# EAGLE board Measure-02b (EAGLE 6.2)
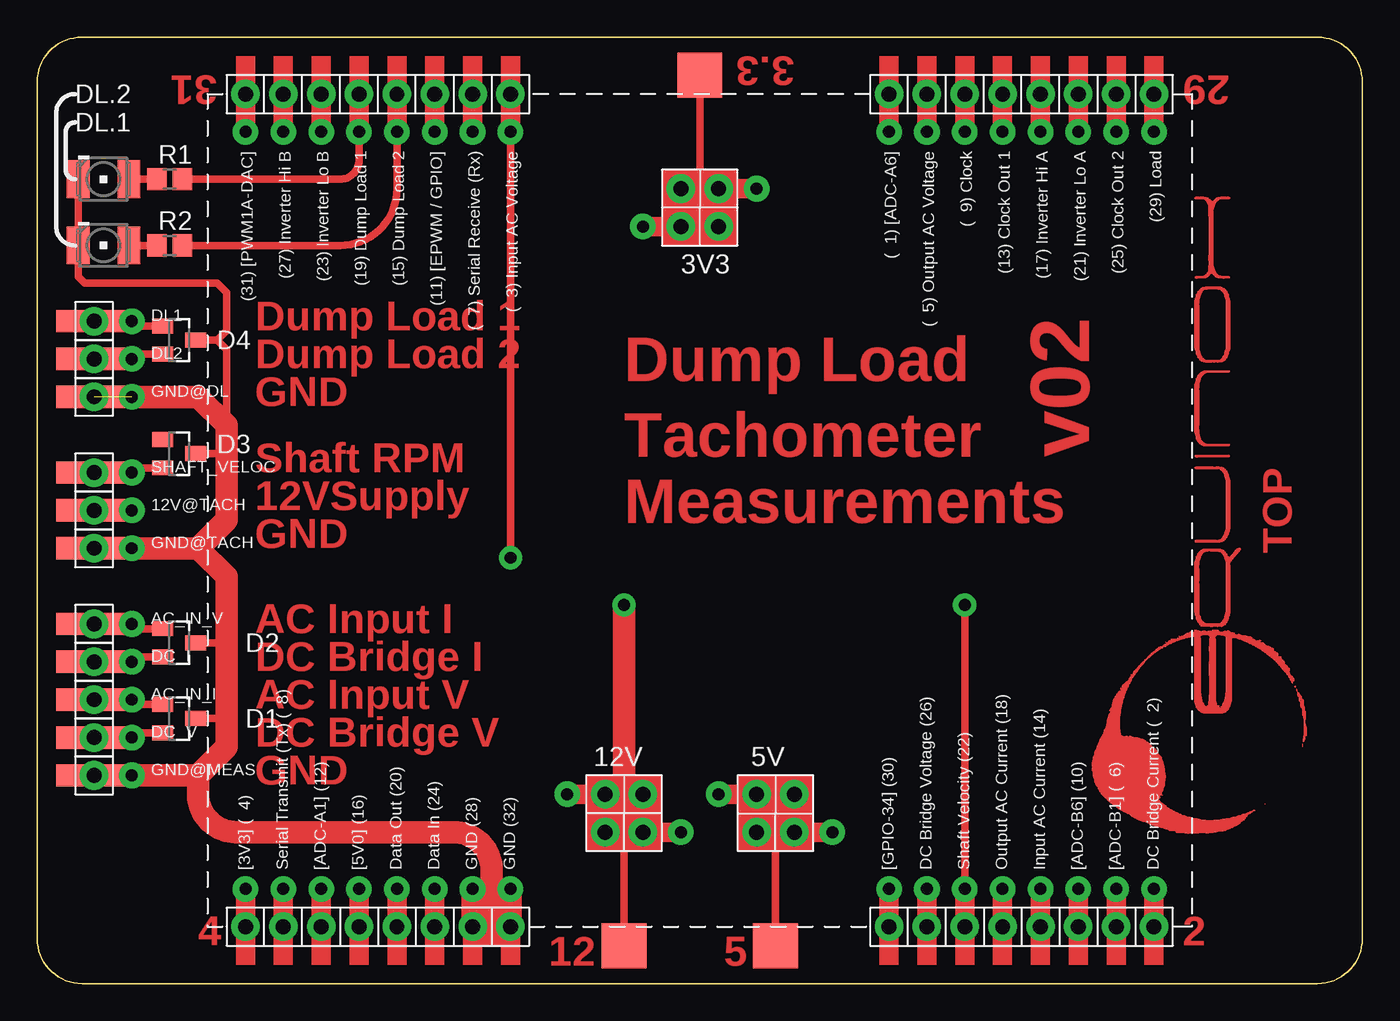
[diagram p0: board, top side]
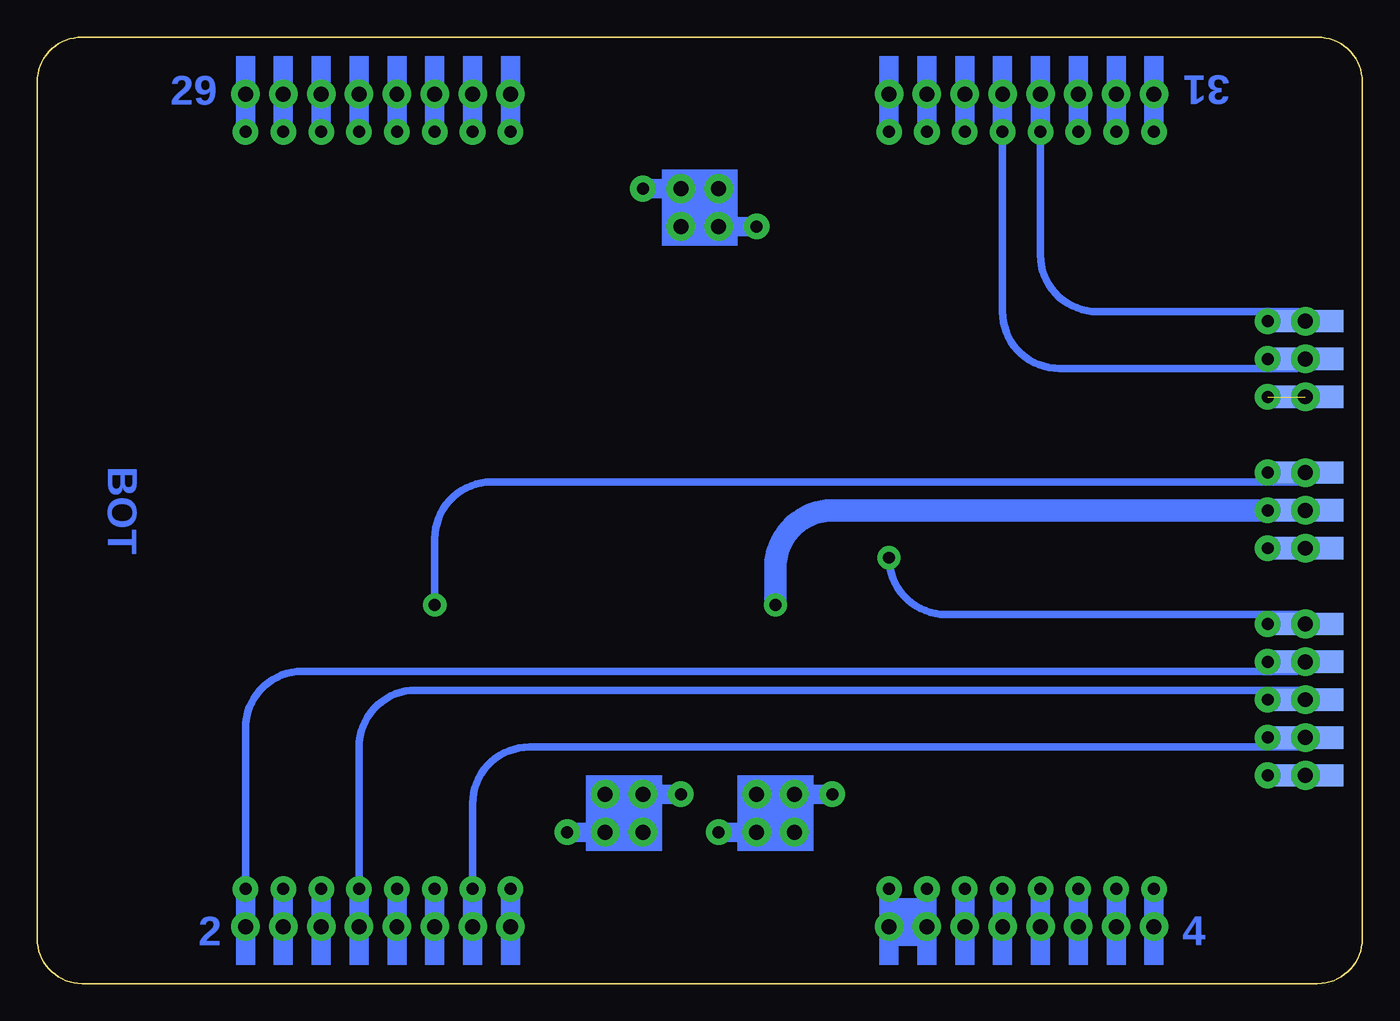
[diagram p1: board, bottom side, seen from below]

Size 88.9 x 63.5 mm. Coordinates in mm from the lower left corner, seen from the top.
Outline: 3,0 85.9,0 arc90 88.9,3 88.9,60.5 arc90 85.9,63.5 3,63.5 arc90 0,60.5 0,3 arc90 3,0
Copper layers (1*16): Top 0.035mm / dielectric 1.5mm / Bottom 0.035mm
Design rules: minimum track width 12mil, minimum drill 0.7mm, track to track 25mil, track to pad 20mil, pad to pad 15mil, via to via 20mil, smd to smd 0mil, copper to edge 40mil, drill to drill 10mil, minimum pad ring 18mil, minimum via ring 15mil, stop-mask expansion 0mil, vias tented up to drill 0mil, thermal gap 15mil
tRestrict: 8 lines
bRestrict: 8 lines

## Footprints (pad centres in the part's own frame; a part is rotated, then mirrored left to right if it is on the bottom)
1X1HEADER(W/VIA) = smd 5.08 x 1.5: P$2 0,0 | smd 5.08 x 1.5 bottom: P$3 0,0 | drill 0.8: P$4 2.54,0 | drill 1: PAD 0,0
SOT23 = smd 1 x 1.4: 1 -0.95,-1.1; 2 0.95,-1.1; 3 0,1.1
PLCC2 = smd 2.54 x 1.524: A 0,1.702; C 0,-1.702
R0805 = smd 1.3 x 1.5: 1 -0.85,0; 2 0.85,0
TESTPAD = smd 3 x 3: TP 0,0
CONTROLLER_STACK = drill 1: 01 -27.94,12.7; 02_DC-BRIDGE-CURRENT 27.94,30.48; 03_INPUT-AC-VOLTAGE -27.94,-12.7; 3V3B -21.59,-1.27; 3V3C -21.59,1.27; 3V3E -19.05,1.27; 3V3F -19.05,-1.27; 04 27.94,-30.48; 05_OUTPUT-AC-VOLTAGE -27.94,15.24; 5VB 19.05,3.81; 5VC 19.05,6.35; 5VE 21.59,6.35; 5VF 21.59,3.81; 06 27.94,27.94; 07_SERIAL-RECEIVE-(RX) -27.94,-15.24; 08_SERIAL-TRANSMIT-(TX) 27.94,-27.94; 09_CLOCK -27.94,17.78; 10 27.94,25.4; 11 -27.94,-17.78; 12 27.94,-25.4; 12VB 19.05,-6.35; 12VC 19.05,-3.81; 12VE 21.59,-3.81; 12VF 21.59,-6.35; 13_CLOCK-OUT-1 -27.94,20.32; 14_AC-INPUT-CURRENT 27.94,22.86; 15_DUMP-LOAD-2 -27.94,-20.32; 16 27.94,-22.86; 17_INVERTER-HI-A -27.94,22.86; 18_AC-OUTPUT-CURRENT 27.94,20.32; 19_DUMP-LOAD-1 -27.94,-22.86; 20_DATA-OUT 27.94,-20.32; 21_INVERTER-LO-A -27.94,25.4; 22_SHAFT-VELOCITY 27.94,17.78; 23_INVERTER-LO-B -27.94,-25.4; 24_DATA-IN 27.94,-17.78; 25_CLOCK-OUT-2 -27.94,27.94; 26_DC-BRIDGE-VOLTAGE 27.94,15.24; 27_INVERTER-HI-B -27.94,-27.94; 28_GND 27.94,-15.24; 29_LOAD -27.94,30.48; 30 27.94,12.7; 31 -27.94,-30.48; 32_GND 27.94,-12.7 | drill 0.8: 3V3A -21.59,3.81; 3V3D -19.05,-3.81; 5VA 19.05,1.27; 5VD 21.59,8.89; 12VA 19.05,-8.89; 12VD 21.59,-1.27; C1 -25.4,12.7; C2 25.4,30.48; C3 -25.4,-12.7; C4 25.4,-30.48; C5 -25.4,15.24; C6 25.4,27.94; C7 -25.4,-15.24; C8 25.4,-27.94; C9 -25.4,17.78; C10 25.4,25.4; C11 -25.4,-17.78; C12 25.4,-25.4; C13 -25.4,20.32; C14 25.4,22.86; C15 -25.4,-20.32; C16 25.4,-22.86; C17 -25.4,22.86; C18 25.4,20.32; C19 -25.4,-22.86; C20 25.4,-20.32; C21 -25.4,25.4; C22 25.4,17.78; C23 -25.4,-25.4; C24 25.4,-17.78; C25 -25.4,27.94; C26 25.4,15.24; C27 -25.4,-27.94; C28 25.4,-15.24; C29 -25.4,30.48; C30 25.4,12.7; C31 -25.4,-30.48; C32 25.4,-12.7

## Placement (x,y rotation side)
12V@TACH  1X1HEADER(W/VIA)  [1X1HEADER(W/VIA)]  3.81,31.75 0 top
AC_IN_I  1X1HEADER(W/VIA)  [1X1HEADER(W/VIA)]  3.81,19.05 0 top
AC_IN_V  1X1HEADER(W/VIA)  [1X1HEADER(W/VIA)]  3.81,24.13 0 top
D1  BAS40-06  [SOT23]  9.53,17.78 270 top
D2  BAS40-06  [SOT23]  9.53,22.86 270 top
D3  BAS40-06  [SOT23]  9.53,35.56 270 top
D4  BAS40-06  [SOT23]  9.53,43.18 270 top
DC_I  1X1HEADER(W/VIA)  [1X1HEADER(W/VIA)]  3.81,21.59 0 top
DC_V  1X1HEADER(W/VIA)  [1X1HEADER(W/VIA)]  3.81,16.51 0 top
DL1  1X1HEADER(W/VIA)  [1X1HEADER(W/VIA)]  3.81,44.45 0 top
DL2  1X1HEADER(W/VIA)  [1X1HEADER(W/VIA)]  3.81,41.91 0 top
DL.1  PLCC2  [PLCC2]  4.45,53.98 270 top
DL.2  PLCC2  [PLCC2]  4.45,49.53 270 top
GND@DL  1X1HEADER(W/VIA)  [1X1HEADER(W/VIA)]  3.81,39.37 0 top
GND@MEAS  1X1HEADER(W/VIA)  [1X1HEADER(W/VIA)]  3.81,13.97 0 top
GND@TACH  1X1HEADER(W/VIA)  [1X1HEADER(W/VIA)]  3.81,29.21 0 top
R1  39  [R0805]  8.89,53.98 180 top
R2  39  [R0805]  8.89,49.53 180 top
SHAFT_VELOC  1X1HEADER(W/VIA)  [1X1HEADER(W/VIA)]  3.81,34.29 0 top
T3V3  TESTPAD  [TESTPAD]  44.45,60.96 0 top
T5V0  TESTPAD  [TESTPAD]  49.53,2.54 180 top
T12V0  TESTPAD  [TESTPAD]  39.37,2.54 180 top
U$1  CONTROLLER_STACK  [CONTROLLER_STACK]  44.45,31.75 270 top

## Library data of the parts
12V@TACH AC_IN_I AC_IN_V DC_I DC_V DL1 DL2 GND@DL GND@MEAS GND@TACH SHAFT_VELOC = headers v6-2
D1-D4 = diode
DL.1 DL.2 T3V3 T5V0 T12V0 U$1 = PCB_ControlStack
R1 R2 = resistor

## Nets
3V3: T3V3.TP U$1.3V3A U$1.3V3B U$1.3V3C U$1.3V3D U$1.3V3E U$1.3V3F
5V0: T5V0.TP U$1.5VA U$1.5VB U$1.5VC U$1.5VD U$1.5VE U$1.5VF
12V0: 12V@TACH.P$2 12V@TACH.P$3 12V@TACH.P$4 12V@TACH.PAD T12V0.TP U$1.12VA U$1.12VB U$1.12VC U$1.12VD U$1.12VE U$1.12VF
ADCA0: AC_IN_V.P$2 AC_IN_V.P$3 AC_IN_V.P$4 AC_IN_V.PAD D2.1 U$1.03_INPUT-AC-VOLTAGE U$1.C3
ADCA2: D2.2 DC_I.P$2 DC_I.P$3 DC_I.P$4 DC_I.PAD U$1.02_DC-BRIDGE-CURRENT U$1.C2
ADCA5: D3.2 SHAFT_VELOC.P$2 SHAFT_VELOC.P$3 SHAFT_VELOC.P$4 SHAFT_VELOC.PAD U$1.22_SHAFT-VELOCITY U$1.C22
ADCB0: AC_IN_I.P$2 AC_IN_I.P$3 AC_IN_I.P$4 AC_IN_I.PAD D1.1 U$1.14_AC-INPUT-CURRENT U$1.C14
ADCB2: D1.2 DC_V.P$2 DC_V.P$3 DC_V.P$4 DC_V.PAD U$1.26_DC-BRIDGE-VOLTAGE U$1.C26
EPWM3A: D4.1 DL1.P$2 DL1.P$3 DL1.P$4 DL1.PAD R1.1 U$1.19_DUMP-LOAD-1 U$1.C19
EPWM3B: D4.2 DL2.P$2 DL2.P$3 DL2.P$4 DL2.PAD R2.1 U$1.15_DUMP-LOAD-2 U$1.C15
GND: D1.3 D2.3 D3.3 D4.3 DL.1.C DL.2.C GND@DL.P$2 GND@DL.P$3 GND@DL.P$4 GND@DL.PAD GND@MEAS.P$2 GND@MEAS.P$3 GND@MEAS.P$4 GND@MEAS.PAD GND@TACH.P$2 GND@TACH.P$3 GND@TACH.P$4 GND@TACH.PAD U$1.28_GND U$1.32_GND U$1.C28 U$1.C32
N$1: DL.2.A R2.2
N$2: DL.1.A R1.2
STARTUP: D3.1

## Tracks (layer width: path | path; a pad name or v marks a point on that pad's centre or on a via)
3V3
  Top 0.5: T3V3.TP 44.45,53.34 U$1.3V3C
  Bottom 0.5: U$1.3V3D U$1.3V3F U$1.3V3B U$1.3V3C | U$1.3V3A U$1.3V3C | U$1.3V3E U$1.3V3C
5V0
  Top 0.5: U$1.5VA U$1.5VB U$1.5VC U$1.5VE | U$1.5VF 49.53,10.16 | 49.53,10.16 U$1.5VE | U$1.5VE U$1.5VD | T5V0.TP 49.53,10.16
12V0  (via drill 0.8)
  Top 0.5: U$1.12VA U$1.12VB U$1.12VC U$1.12VE | U$1.12VD U$1.12VE | U$1.12VF 39.37,10.16 | 39.37,10.16 U$1.12VE | T12V0.TP 39.37,10.16
  Top 1.5: v39.37,25.4 39.37,10.16
  Bottom 1.5: 12V@TACH.PAD 12V@TACH.P$4 35.56,31.75 arc-90 39.37,27.94 v39.37,25.4
ADCA0  (via drill 0.8)
  Top 0.5: v31.75,28.57 U$1.C3 U$1.03_INPUT-AC-VOLTAGE | D2.1 4.13,23.81 arc-90 AC_IN_V.PAD
  Bottom 0.5: 6.99,24.77 27.94,24.77 arc90 v31.75,28.57 | 6.99,24.77 arc90 AC_IN_V.P$4 | 6.99,24.77 4.45,24.77 arc90 AC_IN_V.PAD
ADCA2
  Top 0.5: D2.2 4.13,21.91 arc90 DC_I.PAD
  Bottom 0.5: 6.99,20.95 71.12,20.95 arc-90 74.93,17.14 U$1.C2 U$1.02_DC-BRIDGE-CURRENT | 6.99,20.95 arc-90 DC_I.P$4 | 6.99,20.95 4.45,20.95 arc-90 DC_I.PAD
ADCA5  (via drill 0.8)
  Top 0.5: D3.2 4.13,34.61 arc90 SHAFT_VELOC.PAD | v62.23,25.4 U$1.C22 U$1.22_SHAFT-VELOCITY
  Bottom 0.5: 6.99,33.66 58.42,33.66 arc-90 62.23,29.84 v62.23,25.4 | 6.99,33.66 arc-90 SHAFT_VELOC.P$4 | 6.99,33.66 4.45,33.66 arc-90 SHAFT_VELOC.PAD
ADCB0
  Top 0.5: D1.1 4.13,18.73 arc-90 AC_IN_I.PAD
  Bottom 0.5: AC_IN_I.P$4 arc-90 6.99,19.68 | 6.99,19.68 63.5,19.68 arc-90 67.31,15.88 U$1.C14 U$1.14_AC-INPUT-CURRENT | 6.99,19.68 4.45,19.68 arc90 AC_IN_I.PAD
ADCB2
  Top 0.5: D1.2 4.13,16.83 arc90 DC_V.PAD
  Bottom 0.5: DC_V.P$4 arc90 6.99,15.88 | 6.99,15.88 55.88,15.88 arc-90 59.69,12.06 U$1.C26 U$1.26_DC-BRIDGE-VOLTAGE | 6.99,15.88 4.45,15.88 arc-90 DC_V.PAD
EPWM3A
  Top 0.5: U$1.19_DUMP-LOAD-1 U$1.C19 21.59,55.24 arc-90 20.32,53.98 R1.1 | D4.1 4.13,44.13 arc-90 DL1.PAD
  Bottom 0.5: 6.99,45.09 17.78,45.09 arc90 21.59,48.9 U$1.C19 | 6.99,45.09 arc90 DL1.P$4 | 6.99,45.09 4.45,45.09 arc90 DL1.PAD
EPWM3B
  Top 0.5: U$1.15_DUMP-LOAD-2 U$1.C15 24.13,53.34 arc-90 20.32,49.53 R2.1 | D4.2 4.13,42.23 arc90 DL2.PAD
  Bottom 0.5: 6.99,41.27 20.32,41.27 arc90 24.13,45.09 U$1.C15 | 6.99,41.27 arc-90 DL2.P$4 | 6.99,41.27 4.45,41.27 arc-90 DL2.PAD
GND  (1 unrouted)
  Top 0.5: D1.3 12.7,17.78 | D3.3 12.7,35.56 | D2.3 12.7,22.86 | D4.3 12.06,43.18 | 12.06,43.18 12.7,42.55 12.7,37.47 | DL.1.C DL.2.C 2.74,47.42 3.17,46.99 12.06,46.99 12.7,46.35 12.7,43.81 12.06,43.18
  Top 1.5: GND@MEAS.PAD GND@MEAS.P$4 10.79,13.97 | U$1.C28 U$1.28_GND 30.48,3.81 | 10.79,29.21 12.7,27.3 12.7,22.86 12.7,17.78 12.7,15.88 10.79,13.97 | GND@TACH.PAD GND@TACH.P$4 10.79,29.21 | GND@DL.P$4 10.79,39.37 12.7,37.47 12.7,35.56 12.7,31.11 10.79,29.21 | U$1.C32 U$1.32_GND 30.48,3.81 | 30.48,3.81 30.48,7.62 arc90 27.94,10.16 13.34,10.16 arc-90 10.79,12.7 10.79,13.97
  Bottom 1.5: 30.48,3.81 U$1.28_GND
N$1
  Top 0.5: R2.2 DL.2.A
N$2
  Top 0.5: R1.2 DL.1.A
(copper drawn outside any net)
  shapes: Bottom area x1, Top area x2019

## Text on the board
Top: 3.3 | Dump Load 1 | Dump Load | Dump Load 2 | v02 | GND | Tachometer | Shaft RPM | 12VSupply | Measurements | TOP | GND | AC Input I | DC Bridge I | AC Input V | DC Bridge V | GND | 12 | 5
Bottom: BOT